# Altium PCB shield_lcd4-3.PcbDoc
Units mm, origin at the board's own origin, x right, y up, seen from the top; angles counter-clockwise.
Board outline 120 x 84 mm, 2 copper layers (Top Layer, Bottom Layer), stack 1.57 mm thick; 35 components, 142 nets, 267 pads, 113 vias.
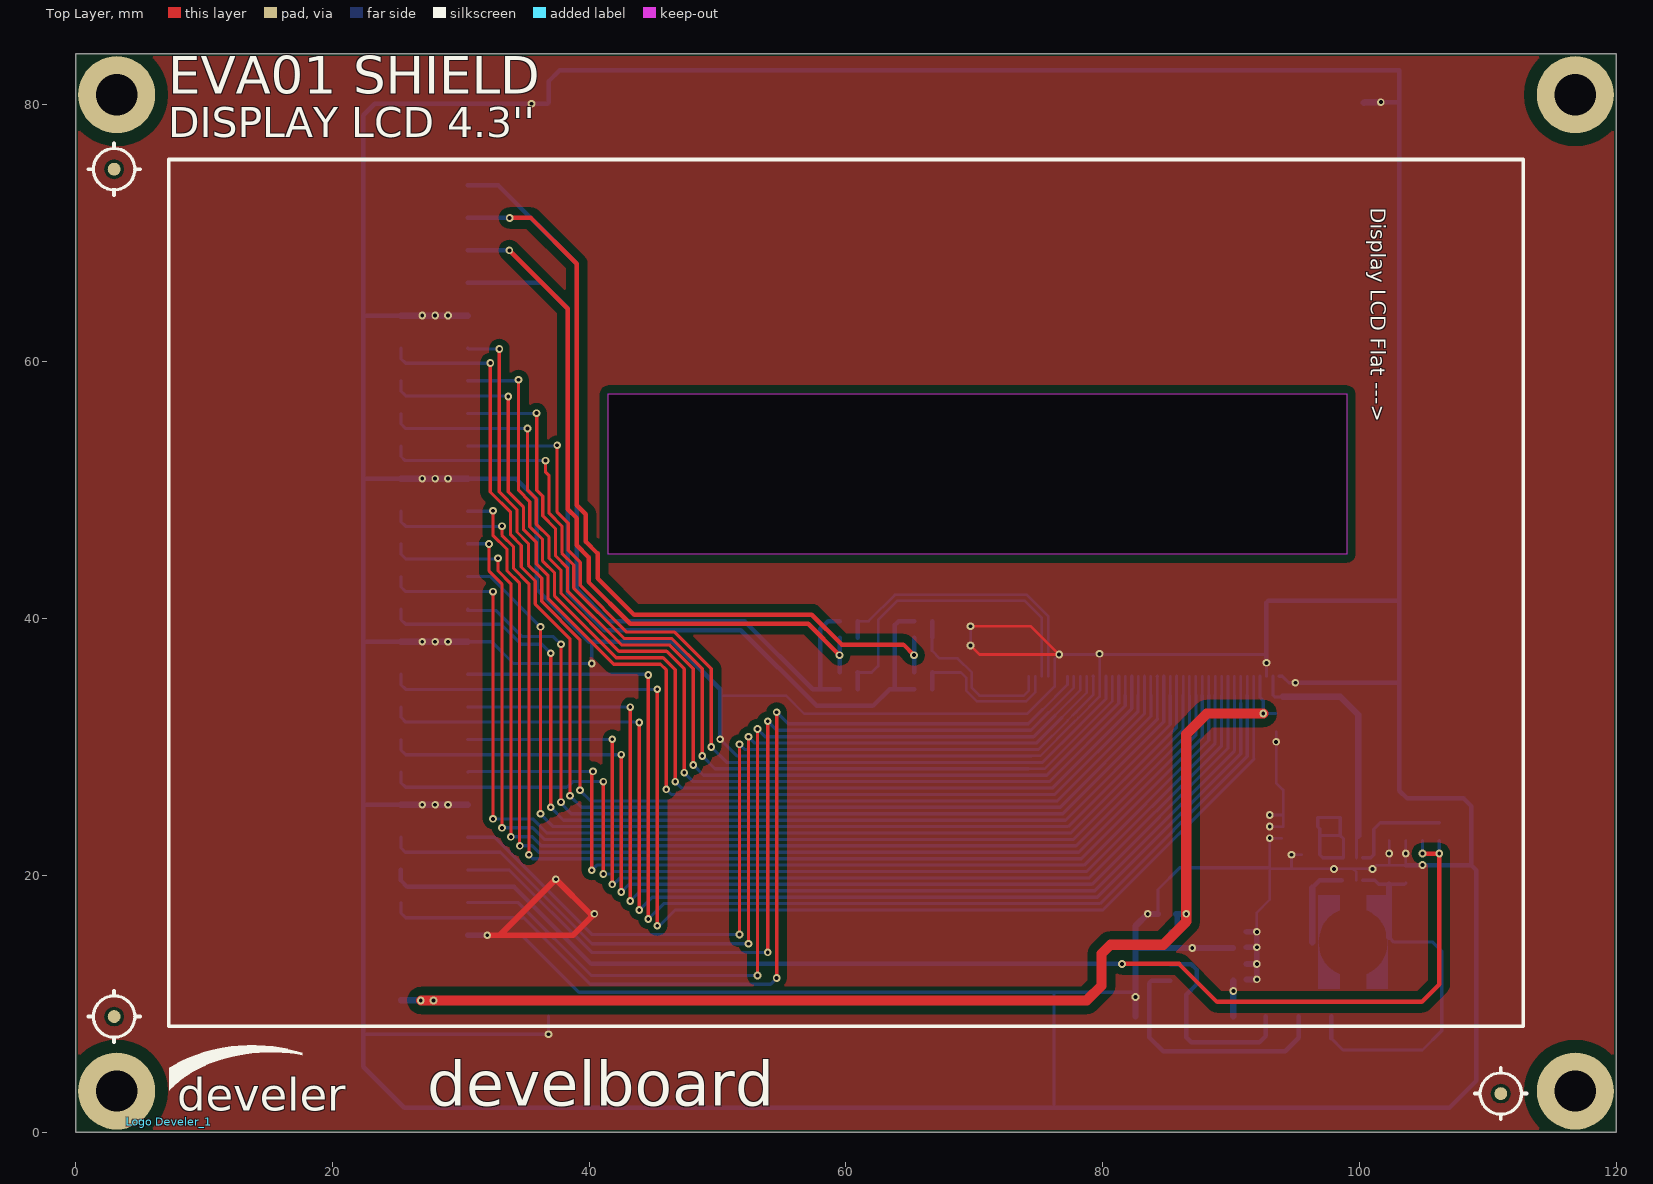
[diagram p0: Top Layer view]
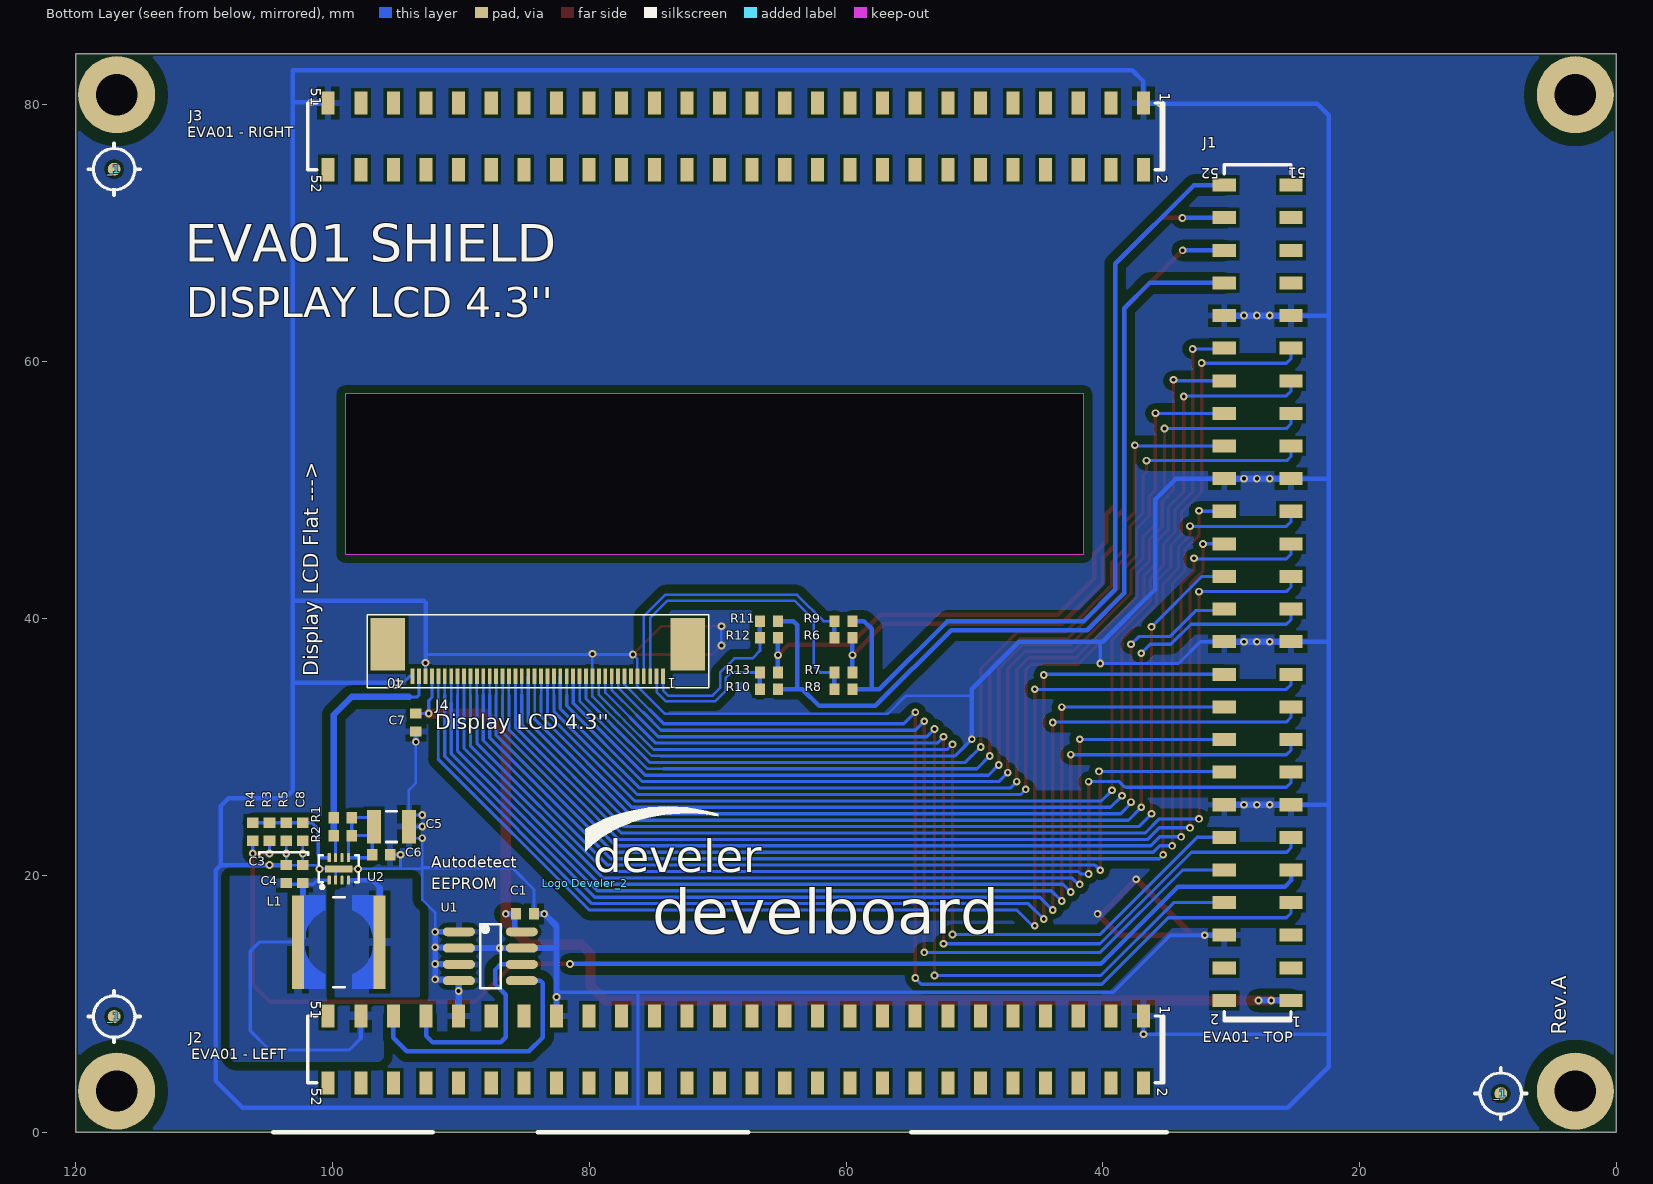
[diagram p1: Bottom Layer view, seen from below]

## Layer stack, top to bottom
Top Solder: solder mask 0.0102, Solder Resist, Dk 3.5
Top Layer: signal copper 0.035
Dielectric1: core 1.5, FR-4, Dk 4.2
Bottom Layer: signal copper 0.035
Bottom Solder: solder mask 0.0102, Solder Resist, Dk 3.5

## Board outline
0,0 0,84 120,84 120,0
cut-out: 99,57.5 99,45 41.5,45 41.5,57.5

## Design rules (kind name [scope] priority, off if disabled: settings)
Clearance Clearance_shld [(ObjectKind = 'Pad') And (Net = 'SHLD')] p1: gap=0.8 except(0.5: Track-SMDPad SMDPad-SMDPad)
Clearance Clearance_hole [(ObjectKind = 'Pad') And (Net = 'No Net') And (AsMM(HoleDiameter) = 3.2)] p2: gap=1
Clearance Clearance_poly [inpoly] p3: gap=0.25 except(0.65: Arc-Fill Arc-Poly Arc-Region Track-Fill Track-Poly Track-Region Poly-Poly Poly-Region Region-Region)
Clearance Clearance_80 [(ObjectKind = 'Track') And (AsMM(Width) = 0.8)] p4: gap=0.8
Clearance Clearance_45 [(ObjectKind = 'Track') And (AsMM(Width) = 0.45)] p5: gap=0.45
Clearance Clearance_35 [(ObjectKind = 'Track') And (AsMM(Width) = 0.35)] p6: gap=0.35
Clearance Clearance_com [incomponent('j4', 'u2')] p7: gap=0.15
Clearance [All] p8: gap=0.25
ComponentClearance [All] p1: gap=0.25 collisioncheckmode=3 verticalgap=0.25 showdistances=FALSE
HoleSize [All] p1: absolutevalues=TRUE maxlimit=10 minlimit=0.2 maxpercent=80.000 minpercent=20.000
HoleToHoleClearance [All] p1: gap=0.25 allowstackedmicrovias=TRUE
MinimumSolderMaskSliver MinimumSolderMaskSliver_con [incomponent('j4')] p1: minsoldermaskwidth=0.08
MinimumSolderMaskSliver [All] p2: minsoldermaskwidth=0.1
PlaneClearance [All] p1: clearance=0.5
PlaneConnect PlaneConnect_via [isvia or hasfootprint('TEST_POINT_SMD_R5x3MM')] p1: planeconnectstyle=Direct reliefexpansion=0.508 reliefentries=4 reliefconductorwidth=0.254 reliefairgap=0.254
PlaneConnect [All] p2: planeconnectstyle=Relief reliefexpansion=0.6 reliefentries=4 reliefconductorwidth=0.35 reliefairgap=0.35
PolygonConnect PolygonConnect_via [isvia or hasfootprint('TEST_POINT_SMD_R5x3MM')] p1: connectstyle=Direct reliefconductorwidth=0.254 reliefentries=4 polygonreliefangle="90 Angle" airgapwidth=0.254
PolygonConnect PolygonConnect_gnd [InNet('gnd')] p2: connectstyle=Relief reliefconductorwidth=0.5 reliefentries=4 polygonreliefangle="90 Angle" airgapwidth=0.35
PolygonConnect PolygonConnect_5v [InNet('+5V','sw')] p3: connectstyle=Relief reliefconductorwidth=0.65 reliefentries=4 polygonreliefangle="90 Angle" airgapwidth=0.35
PolygonConnect [All] p4: connectstyle=Relief reliefconductorwidth=0.35 reliefentries=4 polygonreliefangle="90 Angle" airgapwidth=0.6
RoutingVias [All] p1: holewidth=0.3 width=0.6 viastyle="Through Hole" minholewidth=0.2 minwidth=0.35 maxholewidth=0.5 maxwidth=1
SilkToSilkClearance [All] p1: silktosilkclearance=0.1
SilkToSolderMaskClearance [IsPad] p1: minsilkscreentomaskgap=0.15 clearancetoexposedcopper=TRUE
SolderMaskExpansion SolderMaskExpansion_via [isVia] p1: expansion=-10
SolderMaskExpansion [All] p2: expansion=0.05
Width [All] p1: maxlimit=5 minlimit=0.15 preferedwidth=0.25
22 further rules are at their usual default settings.

## Classes and differential pairs
net class Power: +3.3V GND VBATT

## Components (designator, comment, footprint, x,y, rotation, side; value= is the part's Value field where it differs from the comment)
_1 "" Fiducial_mark 117,75 r180 bottom
_1 "" Fiducial_mark 117,9 r180 bottom
_1 "" Fiducial_mark 9,3 r180 bottom
C1 "100nF" 0603_[1608] 85,17 r0 bottom
C3 "100nF" 0603_[1608] 102.3,20.1 r270 bottom
C4 "1uF" 0603_[1608] 103.6,20.1 r270 bottom
C5 "2.2uF" 1210_[3225] 95.4,23.8 r0 bottom
C6 "100nF" 0603_[1608] 96.2,21.6 r0 bottom
C7 "100nF" 0603_[1608] 93.5,31.9 r270 bottom
C8 "100nF" 0603_[1608] 102.3,23.4 r90 bottom
J1 "EVA01 - TOP" SOCKET_2x26_2.54MM_SMD 27.94,42.01 r90 bottom locked
J2 "EVA01 - LEFT" SOCKET_2x26_2.54MM_SMD 68.58,6.44 r0 bottom locked
J3 "EVA01 - RIGHT" SOCKET_2x26_2.54MM_SMD 68.58,77.56 r0 bottom locked
J4 "Display LCD 4.3''" fcc-zif_40pin_0.5mm 84,36.5 r0 bottom locked
L1 "22uH - WE 744062220" WE-TPC-6823-X 99.5,14.8 r0 bottom
"Logo Develer_1" "" Develer_logo_15x6mm 7.3,0.8 r0 top
"Logo Develer_2" "" Develer_logo_15x6mm 80.3,19.4 r180 bottom
R1 "NP" 0603_[1608] 99.2,24.5 r180 bottom
R2 "10R 1%" 0603_[1608] 99.2,23.1 r180 bottom
R3 "390K 1%" 0603_[1608] 104.9,23.4 r270 bottom
R4 "820K 1%" 0603_[1608] 106.2,23.4 r90 bottom
R5 "220K 1%" 0603_[1608] 103.6,23.4 r270 bottom
R6 "0R" 0603_[1608] 60.2,38.5 r180 bottom
R7 "NP" 0603_[1608] 60.2,35.8 r180 bottom
R8 "0R" 0603_[1608] 60.2,34.5 r180 bottom
R9 "NP" 0603_[1608] 60.2,39.8 r180 bottom
R10 "0R" 0603_[1608] 66,34.5 r180 bottom
R11 "NP" 0603_[1608] 66,39.8 r180 bottom
R12 "0R" 0603_[1608] 66,38.5 r180 bottom
R13 "NP" 0603_[1608] 66,35.8 r180 bottom
U1 "24C128" SOIC8 87.7,13.7 r180 bottom
U2 "LT3591EDDB" PQFN50P300X200X75_HS-9L 99.5,20.5 r180 bottom
? "" Fiducial_mark 111,3 r0 top
? "" Fiducial_mark 3,9 r0 top
? "" Fiducial_mark 3,75 r0 top

## Footprints (in the part's own frame and the unit in brackets; to place one, negate y for a bottom-side part, rotate by r counter-clockwise, add the part's x,y. Pads: shape width x height; smd on the part's side, far side on the other; paste and mask are expansions set on the pad)
0603_[1608] [mm] "Chip Capacitor, Body 1.6x0.8mm, IPC High Density"
  rect 0.8x0.9 smd: 1(-0.7,0) 2(0.7,0)
  body extent -0.75,-0.4 0.75,0.4, height 0.67
1210_[3225] [mm] "Chip Resistor, Body 3.2x2.5mm, IPC High Density"
  rect 1.1x2.6 smd: 1(-1.35,0) 2(1.35,0)
  silkscreen extent -0.4,-1.2 0.4,1.2, body extent -1.6,-1.25 1.6,1.25, height 1.7
Develer_logo_15x6mm [mm]
  silkscreen extent 0,2.47 10.36,5.98
fcc-zif_40pin_0.5mm [mm] "40 pins"
  rect 0.3x1.2 smd: 1(-9.75,0.99) 2(-9.25,0.99) 3(-8.75,0.99) 4(-8.25,0.99) 5(-7.75,0.99) 6(-7.25,0.99) 7(-6.75,0.99) 8(-6.25,0.99) 9(-5.75,0.99) 10(-5.25,0.99) 11(-4.75,0.99) 12(-4.25,0.99) 13(-3.75,0.99) 14(-3.25,0.99) 15(-2.75,0.99) 16(-2.25,0.99) 17(-1.75,0.99) 18(-1.25,0.99) 19(-0.75,0.99) 20(-0.25,0.99) 21(0.25,0.99) 22(0.75,0.99) 23(1.25,0.99) 24(1.75,0.99) 25(2.25,0.99) 26(2.75,0.99) 27(3.25,0.99) 28(3.75,0.99) 29(4.25,0.99) 30(4.75,0.99) 31(5.25,0.99) 32(5.75,0.99) 33(6.25,0.99) 34(6.75,0.99) 35(7.25,0.99) 36(7.75,0.99) 37(8.25,0.99) 38(8.75,0.99) 39(9.25,0.99) 40(9.75,0.99)
  rect 2.7x4.1 smd: Z1(-11.68,-1.5) Z2(11.68,-1.5)
  silkscreen extent -13.3,-3.8 13.3,1.89, body extent -13.2,-3.8 13.2,1.3, height 2.06
Fiducial_mark [mm]
  round 1 smd mask+0.95: "Fiducial Mark"(0,0)
  silkscreen extent -2,-2 2,2
PQFN50P300X200X75_HS-9L [mm] "PQFN, 8-Leads, Body 3,00x2,00mm, Pitch 0,50mm, Thermal Pad 2,15x0,56mm, IPC High Density"
  rrect50% 0.25x0.7 smd: 1(-0.75,-0.875) 2(-0.25,-0.875) 3(0.25,-0.875) 4(0.75,-0.875) 5(0.75,0.875) 6(0.25,0.875) 7(-0.25,0.875) 8(-0.75,0.875)
  rect 2.15x0.56 smd: 9(0,0)
  silkscreen extent -1.55,-1.52 1.55,1.05, body extent -1.55,-1.05 1.55,1.05, height 0.75
SOCKET_2x26_2.54MM_SMD [mil] "52pin"
  rect 40x71 smd: 1(-1250,-102.36) 3(-1150,-102.36) 4(-1150,102.36) 5(-1050,-102.36) 6(-1050,102.36) 7(-950,-102.36) 8(-950,102.36) 9(-850,-102.36) 10(-850,102.36) 11(-750,-102.36) 12(-750,102.36) 13(-650,-102.36) 14(-650,102.36) 15(-550,-102.36) 16(-550,102.36) 17(-450,-102.36) 18(-450,102.36) 19(-350,-102.36) 20(-350,102.36) 21(-250,-102.36) 22(-250,102.36) 23(-150,-102.36) 24(-150,102.36) 25(-50,-102.36) 26(-50,102.36) 27(50,-102.36) 28(50,102.36) 29(150,-102.36) 30(150,102.36) 31(250,-102.36) 32(250,102.36) 33(350,-102.36) 34(350,102.36) 35(450,-102.36) 36(450,102.36) 37(550,-102.36) 38(550,102.36) 39(650,-102.36) 40(650,102.36) 41(750,-102.36) 42(750,102.36) 43(850,-102.36) 44(850,102.36) 45(950,-102.36) 46(950,102.36) 47(1050,-102.36) 48(1050,102.36) 49(1150,-102.36) 50(1150,102.36) 51(1250,-102.36) 52(1250,102.36)
  rect 39.37x70.87 smd: 2(-1250,102.36)
  silkscreen extent -1313,-102 1313,102, body extent -1311,-132 1311,132, height 292
SOIC8 [mm] "SOIC, 8-Leads, Body 4.9x3.8mm, Pitch 1.27mm, IPC Low Density"
  oval 2.5x0.7 smd: 1(-2.45,1.905) 2(-2.45,0.635) 3(-2.45,-0.635) 4(-2.45,-1.905) 5(2.45,-1.905) 6(2.45,-0.635) 7(2.45,0.635) 8(2.45,1.905)
  silkscreen extent -0.8,-2.5 0.8,2.5, body extent -2,-2.5 2,2.5, height 1.75
WE-TPC-6823-X [mm] "SMD Inductor, 2-Leads, Body 6,8x6,8mm"
  rect 0.95x7.3 smd: 1(-3.175,0) 2(3.175,0)
  Top Layer region: -2.7,-3.65 -1.05,-3.65 -1.05,-2.5 -1.45,-2.3 -1.65,-2.15 -1.9,-1.95 -2.2,-1.6 -2.35,-1.35 -2.45,-1.15 -2.65,-0.55 -2.7,0
  Top Layer region: 2.7,-3.65 1.05,-3.65 1.05,-2.5 1.35,-2.35 1.7,-2.1 1.95,-1.9 2,-1.85 2.2,-1.6 2.35,-1.35 2.45,-1.15 2.55,-0.9 2.6,-0.7 2.65,-0.5 2.7,0
  Top Layer region: 2.7,3.65 1.05,3.65 1.05,2.5 1.35,2.35 1.65,2.15 2,1.85 2.3,1.45 2.55,0.95 2.65,0.55 2.7,0
  Top Layer region: -2.7,3.65 -1.05,3.65 -1.05,2.5 -1.45,2.3 -1.6,2.2 -1.9,1.95 -2.2,1.6 -2.4,1.25 -2.55,0.95 -2.6,0.75 -2.65,0.5 -2.7,0
  silkscreen extent -0.45,-3.5 0.45,3.5, body extent -3.4,-3.4 3.4,3.4, height 2.29

## Part data
C1 C3 C6 C8: library part Cap, "Ceramic X7R 50V"
C4: library part Cap, "Ceramic X7R, X5R 16V"
C5: library part Cap, "Ceramic X7R, X5R 50V"
C7: library part Cap, "Ceramic X5R 6.3V, 10V"
J1: library part "Header 26x2", "Socket Header, 26 pin, 13x2, 2.54mm, H=8.5mm"
J2 J3: library part "Header 26x2", "Pin header 26x2"
J4: library part "Header 40", "40-pin, 0.5mm, SMT, ZIF, Horizontal, Top Contact (WE 68714014022; Molex: 54104-4031)"
L1: library part Inductor, "Power Inductor"
R1 R2: library part Res1, "Resistor 0.125W"
R3 R4 R5 R6 R7 R8 R9 R10 R11 R12 R13: library part Res1, "Resistor"
U1: library part EEPROM-SOIC8, "EEPROM"
U2: library part LT3591, "White LED Driver with Integrated Schottky"

## Free pads (board coordinates)
  round 6 hole 3.2: Hole(3.2,3.2) Hole(3.2,80.8) Hole(116.8,3.2) Hole(116.8,80.8)

## Via types
v1: diameter 0.6, hole 0.3, Top Layer to Bottom Layer, 113 vias

## Nets (pads, with @x,y where several pads share a name; then routed paths per layer and width w, separated by ;. In a path a pad name is that pad's centre, name@x,y a point inside that pad or via, vN(x,y) a via of type N, cw(c..) or ccw(c..) an arc to the next point about the centre after c; other vN are vias at no path point)
+1.8V: J3.49
+3.3V: C1.2 C7.1 J1.1 J4.37 U1.8 | length 94.1
  Top Layer w0.8: v1@26.9,10.26 78.76,10.26 79.9,11.4 79.9,13.9 80.6,14.6 84.7,14.6 86.5,16.4 v1(86.5,17) 86.5,31 88.1,32.6 v1(92.5,32.6)
  Bottom Layer w0.25: J1.1 J1.1@25.4,10.2 ; J4.37 92.25,33.85 92.5,33.6 v1(92.5,32.6) C7.1
  Bottom Layer w0.45: U1.8@85.35,15.605 85.705,15.605 85.8,15.7 C1.2@85.8,17 ; C1.2 C1.2@85.8,17 ; v1(86.5,17) C1.2@85.8,17
  Bottom Layer w0.5: J1.1 v1@27.9,10.26
  other v1: 26.88,10.26 27.88,10.26
+5V: C3.2 C4.2 J2.49 L1.2 U2.1 | length 29.8
  Bottom Layer w0.25: 97.79,7.31 98.7,6.4 104.9,6.4 106.4,7.9 106.4,14.1 105.7,14.8 L1.2 L1.2@102.3,15.175 ; U2.1 101.175,19.625 101.5,19.3 C3.2@102.3,19.3 ; C3.2 C3.2@102.3,19.3 ; C4.2 103.5,19.3 C3.2@102.3,19.3
  Bottom Layer w0.345: 97.79,7.31 J2.49
  Bottom Layer w0.45: L1.2@102.3,15.175 C3.2@102.3,19.3
ADCREF_EXT: J2.46
BOOT_RECOVERY: J2.52
GND: C1.1 C3.1 C4.1 C5.1 C6.1 C7.2 C8.1 J1.6 J1.13 J1.14 J1.23 J1.24 J1.33 J1.34 J1.43 J1.44 J2.1 J2.37 J2.43 J3.1 J3.51 J4.5 J4.12 J4.38 J4.40 R5.2 U1.1 U1.2 U1.3 U1.4 U1.7 U2.2 U2.9 | length 726.7
  Top Layer w0.2: v1(69.7,37.9) 70.4,37.2 v1(76.6,37.2) 74.4,39.4 v1(69.7,39.4)
  Top Layer w0.45: v1(32.06,15.34) 33.04,15.34 ; 33.04,15.34 v1(37.4,19.7) 40.1,17 v1(40.4,17) 38.74,15.34 33.04,15.34
  Bottom Layer w0.2: 50.2,34 55.323,34 56.748,32.575 74.115,32.575 76.25,34.71 J4.5 76.25,36.85 v1(76.6,37.2) v1@79.75,37.2 ; v1(69.7,37.9) v1(69.7,39.4) ; 74.53,29.3 75.129,29.3 77.722,31.893 ; 77.722,31.894 78.103,32.275 79.75,33.922 J4.12 v1@79.75,37.2 ; v1@79.8,37.3 v1(79.75,37.25) v1@79.75,37.2 ; v1(92,15.6) 92,17.1 93,18.1 93,20.6 ; J4.38 v1(92.75,36.55) ; 92.75,37.2 v1@79.75,37.2 ; v1(93,23.8) C5.1@93.95,23.8 ; v1(93,24.7) C5.1@93.95,24.7 ; C7.2 v1(93.5,30.4) 93.5,27.2 94.05,26.65 C5.1 ; C5.1@93.95,22.9 v1(93,22.9) 93,20.6 ; C6.1 v1(94.7,21.6) 94.7,20.6 94.8,20.5 ; U2.2 99.75,20.25 U2.9 ; C8.1 v1(102.3,21.7) C3.1 ; R5.2 v1(103.6,21.7) C4.1 C3.1 ; 93,20.6 93.1,20.5 94.8,20.5 ; 94.8,20.5 v1(98,20.5) U2.9 ; U2.9 v1(101,20.5) 101.3,20.8 C3.1
  Bottom Layer w0.25: 22.4,7.8 22.57,7.63 v1(36.83,7.63) J2.1 ; J1.24 32.4,38.2 34.1,36.5 40.1,36.5 40.2,36.6 40.2,38.2 ; v1(32.06,15.34) 34.76,15.34 39.2,10.9 76.2,10.9 ; v1(50.2,30.6) 51.5,29.3 74.423,29.3 ; 76.2,1.9 76.2,10.9 ; 82.5,10.9 76.2,10.9 ; C1.1 84.3,18.9 86,20.6 93,20.6 ; J4.40 93.99,35.51 94.5,35 v1(95,35)
  Bottom Layer w0.35: 22.4,25.5 J1.13 ; J1.23 22.5,38.2 22.4,38.1 ; J1.33 22.4,50.9 ; J1.43 22.4,63.6 ; J1.34 34.3,50.9 35.9,49.3 35.9,42.3 40,38.2 40.2,38.2 46.5,38.2 50.2,34.5 50.2,34 v1(50.2,30.6) ; v1(92.75,36.55) 92.75,37.2 92.75,41.25 92.9,41.4 103.1,41.4 ; v1(95,35) 103.1,35 ; v1(101.66,80.22) 103.08,80.22 103.1,80.2 ; C4.1 v1(104.9,20.8) 108.7,20.8 ; 22.4,38.1 22.4,50.9 ; 22.4,38.1 22.4,25.5 22.4,7.8 22.4,5.1 25.6,1.9 76.2,1.9 107,1.9 109.1,4 109.1,20.4 108.7,20.8 ; 22.4,50.9 22.4,63.6 ; 22.4,63.6 22.4,79.2 23.3,80.1 v1(35.5,80.1) 36.77,80.1 J3.1 36.83,81.83 37.7,82.7 103.1,82.7 103.1,80.2 ; 103.1,35 103.1,26.6 103.7,26 108.1,26 108.7,25.4 108.7,20.8 ; 103.1,35 103.1,41.4 ; 103.1,41.4 103.1,80.2
  Bottom Layer w0.45: J1.6 v1(32.06,15.34) ; 82.55,14.3 82.585,14.335 U1.7 v1(86.964,14.335) U1.2 ; v1(83.5,17) C1.1 ; U1.4@91.2,11.9 v1(92,11.9) v1(92,13.1) ; U1.3@91.2,13.1 v1(92,13.1) ; U1.2@91.2,14.4 v1(92,14.4) ; U1.1@91.2,15.6 v1(92,15.6) v1(92,14.4) ; v1(92,13.1) v1(92,14.4)
  Bottom Layer w0.5: J1.13 v1@29,25.5 ; J1.23 J1.24 ; J1.33 J1.34 ; J1.43 J1.44 ; J1.13@25.34,25.5 v1(27,25.5) v1(28,25.5) v1(29,25.5) ; J1.23@25.34,38.2 v1(27,38.2) v1(28,38.2) v1(29,38.2) ; J1.33@25.34,50.9 v1(27,50.9) v1(28,50.9) v1(29,50.9) ; J1.43@25.34,63.6 v1(27,63.6) v1(28,63.6) v1(29,63.6) ; J1.14 v1@29,25.5 ; J2.37 v1(82.55,10.52) 82.55,14.3 82.55,16.05 v1(83.5,17) ; U1.4 90.17,11.775 v1(90.17,11) J2.43 ; J3.51 100.39,80.22 v1(101.66,80.22)
  other v1: 40.2,36.5
HHSDMA_DHSDM_V14: J2.41
HHSDPA_DHSDP_W14: J2.39
JTAGSEL_V2: J2.35
LED+: J4.39 R1.1 R2.1 U2.7 | length 19.9
  Bottom Layer w0.25: J4.39 93.25,34.05 93.4,33.9 94,33.9 ; U2.7 99.75,22.95 R2.1
  Bottom Layer w0.5: 94,33.9 98.5,33.9 99.9,32.5 R1.1 R2.1
NetC5_2: C5.2 C6.2 R1.2 R2.2 U2.5 | length 11.5
  Bottom Layer w0.25: C5.2@96.9,23.1 C6.2 97.125,21.375 U2.5 98.75,22.85 R2.2 ; C5.2@96.9,23.1 R2.2 ; C5.2@96.9,23.1 96.9,23.65 C5.2 96.75,24.5 R1.2 R2.2
NetC8_2: C8.2 R3.1 R4.2 R5.1 U2.8 | length 8.3
  Bottom Layer w0.25: U2.8 100.875,21.375 101.1,21.6 101.1,23.6 101.6,24.1 C8.2 R4.2
NetJ4_1: J4.1 R11.1 R12.1 | length 13.3
  Bottom Layer w0.2: R12.1 66.7,37.5 67.3,36.9 68.7,36.9 69.8,35.8 69.8,34.6 70.4,34 73.85,34 74.25,34.4 J4.1
  Bottom Layer w0.35: R12.1 R11.1
NetJ4_2: J4.2 R10.1 R13.1 | length 12.4
  Bottom Layer w0.2: R13.1 68.95,35.8 69.35,35.4 69.35,34.414 70.214,33.55 74.036,33.55 74.75,34.264 J4.2
  Bottom Layer w0.35: R10.1 R13.1
NetJ4_3: J4.3 R7.1 R8.1 | length 25.3
  Bottom Layer w0.2: R7.1@60.8,35.8 R7.1 62,35.8 62.5,36.3 62.5,39.9 64,41.4 73.9,41.4 75.25,40.05 J4.3
  Bottom Layer w0.35: R8.1 R7.1
NetJ4_4: J4.4 R6.1 R9.1 | length 22.4
  Bottom Layer w0.2: R9.1 61.764,39.8 63.814,41.85 74.086,41.85 75.75,40.186 J4.4
  Bottom Layer w0.35: R6.1 R9.1
PA0_LCDDAT0_TMS_A7: J1.41 J4.20 | length 95.9
  Top Layer w0.25: v1(32.3,59.9) 32.3,49.855 33.875,48.28 33.875,46.532 34.714,45.693 34.714,44.014 35.8,42.928 35.8,41.131 38.5,38.431 v1(38.5,26.2)
  Bottom Layer w0.2: 83.75,34.05 J4.20
  Bottom Layer w0.25: J1.41 25.34,60.24 25.7,59.88 v1@32.3,59.88 ; v1(38.5,26.2) 39.4,25.3 76.68,25.3 83.75,32.37 83.75,34.05
PA1_LCDDAT1_F6: J1.42 J4.19 | length 89.5
  Top Layer w0.25: v1(33,61) 33,49.862 34.375,48.487 34.375,46.739 35.268,45.846 35.268,44.168 36.3,43.136 36.3,41.338 39.275,38.363 v1(39.275,26.627)
  Bottom Layer w0.25: J1.42 30.6,61 v1(33,61) ; v1(39.275,26.627) 40.102,25.8 76.473,25.8 83.25,32.577 J4.19
PA2_LCDDAT2_G1_TXCK_E6: J1.39 J4.18 | length 89.5
  Top Layer w0.25: v1(33.7,57.3) 33.7,49.869 34.875,48.694 34.875,46.946 35.871,45.95 35.871,44.271 36.8,43.343 36.8,41.545 41.895,36.45 45.55,36.45 46,36 v1(46,26.7)
  Bottom Layer w0.2: 82.75,34.05 J4.18
  Bottom Layer w0.25: J1.39 25.34,57.7 25.7,57.34 v1@33.7,57.34 ; v1(46,26.7) 46.4,26.3 76.266,26.3 82.75,32.784 82.75,34.05
PA3_LCDDAT3_G1_RXCK_C6: J1.40 J4.17 | length 83.3
  Top Layer w0.25: v1(34.5,58.6) 34.5,49.986 35.375,49.111 35.375,47.153 36.371,46.157 36.371,44.478 37.3,43.55 37.3,41.752 42.102,36.95 45.757,36.95 46.7,36.007 v1(46.7,27.3)
  Bottom Layer w0.25: J1.40 v1@34.5,58.52 ; v1(46.7,27.3) 47.2,26.8 76.059,26.8 82.25,32.991 J4.17
PA4_LCDDAT4_G1_TXEN_D6: J1.37 J4.16 | length 84.3
  Top Layer w0.25: v1(35.2,54.8) 35.2,49.993 35.875,49.318 35.875,47.361 36.871,46.364 36.871,44.686 37.8,43.757 37.8,41.96 42.309,37.45 46.029,37.45 47.4,36.079 v1(47.4,28)
  Bottom Layer w0.2: 81.75,34.05 J4.16
  Bottom Layer w0.25: J1.37 25.34,55.16 25.7,54.8 v1(35.2,54.8) ; v1(47.4,28) 48.1,27.3 75.852,27.3 81.75,33.198 81.75,34.05
PA5_LCDDAT5_G1_TXER_B6: J1.38 J4.15 | length 77.9
  Top Layer w0.25: v1(35.9,56) 35.914,55.986 35.914,49.986 36.375,49.525 36.375,48 37.371,47.004 37.371,44.893 38.3,43.964 38.3,42.167 42.517,37.95 46.236,37.95 48.1,36.086 v1(48.1,28.6)
  Bottom Layer w0.25: J1.38 v1@35.9,55.98 ; v1(48.1,28.6) 48.9,27.8 75.645,27.8 81.25,33.405 J4.15
PA6_LCDDAT6_G1_CRS_A6: J1.35 J4.14 | length 78.9
  Top Layer w0.25: v1(36.6,52.3) 36.6,51.4 36.875,51.125 36.875,48.207 37.871,47.211 37.871,45.1 38.8,44.171 38.8,42.374 42.724,38.45 46.443,38.45 48.8,36.093 v1(48.8,29.3)
  Bottom Layer w0.2: 74.2,28.3 75.473,28.3 80.75,33.577 J4.14
  Bottom Layer w0.25: J1.35 25.34,52.62 25.66,52.3 v1(36.6,52.3) ; v1(48.8,29.3) 49.8,28.3 74.2,28.3
PA7_LCDDAT7_E5: J1.36 J4.13 | length 72.6
  Top Layer w0.25: v1(37.5,53.5) 37.5,48.289 38.371,47.418 38.371,45.307 39.3,44.378 39.3,42.581 42.931,38.95 46.65,38.95 49.5,36.1 v1(49.5,30)
  Bottom Layer w0.25: J1.36 v1@37.48,53.44 ; v1(49.5,30) 50.7,28.8 75.301,28.8 78.197,31.696 ; 78.197,31.697 78.3,31.8 80.25,33.75 J4.13
PA8_LCDDAT8_TCK_A5: J1.31 J4.28 | length 96.6
  Top Layer w0.25: v1(33.2,47.2) 33.2,46.5 34.1,45.6 34.1,43.921 35.3,42.721 v1(35.3,21.6)
  Bottom Layer w0.2: 87.75,34.05 J4.28
  Bottom Layer w0.25: J1.31 25.34,47.54 25.7,47.18 v1@33.2,47.18 ; v1(35.3,21.6) 35.6,21.3 78.337,21.3 87.75,30.713 87.75,34.05
PA9_LCDDAT9_G1_COL_F4: J1.32 J4.27 | length 90.2
  Top Layer w0.25: v1(32.5,48.4) 32.5,46.493 33.6,45.393 33.6,43.714 34.575,42.739 34.575,22.325 v1(34.6,22.3)
  Bottom Layer w0.2: 87.25,34.05 J4.27
  Bottom Layer w0.25: J1.32 v1@32.5,48.36 ; v1(34.6,22.3) 35.554,22.3 36.054,21.8 78.13,21.8 87.25,30.92 87.25,34.05
PA10_LCDDAT10_G1_RXDV_F5: J1.29 J4.26 | length 91.8
  Top Layer w0.25: v1(32.9,44.7) 32.9,43.707 33.9,42.707 v1(33.9,23)
  Bottom Layer w0.2: 86.75,34.05 J4.26
  Bottom Layer w0.25: J1.29 25.34,45 25.7,44.64 v1@32.9,44.64 ; v1(33.9,23) 35.562,23 36.262,22.3 77.923,22.3 86.75,31.127 86.75,34.05
PA11_LCDDAT11_G1_RXER_D5: J1.30 J4.25 | length 85.3
  Top Layer w0.25: v1(32.2,45.8) 32.2,43.7 33.2,42.7 v1(33.2,23.7)
  Bottom Layer w0.2: 86.25,34.05 J4.25
  Bottom Layer w0.25: J1.30 v1@32.2,45.82 ; v1(33.2,23.7) 35.593,23.7 36.493,22.8 77.716,22.8 86.25,31.334 86.25,34.05
PA12_LCDDAT12_G1_RX0_G5: J1.27 J4.24 | length 86.9
  Top Layer w0.25: v1(32.5,24.4) v1(32.5,42.1)
  Bottom Layer w0.25: J1.27 25.34,42.46 25.7,42.1 v1(32.5,42.1) ; v1(32.5,24.4) 35.6,24.4 36.7,23.3 77.509,23.3 85.75,31.541 J4.24
PA13_LCDDAT13_G1_RX1_C5: J1.28 J4.23 | length 78.4
  Top Layer w0.25: v1(36.2,24.8) v1(36.2,39.355)
  Bottom Layer w0.2: 85.25,34.05 J4.23
  Bottom Layer w0.25: J1.28 32.274,43.28 v1(36.2,39.355) ; v1(36.2,24.8) 37.2,23.8 77.302,23.8 85.25,31.748 85.25,34.05
PA14_LCDDAT14_G1_TX0_E4: J1.25 J4.22 | length 80.5
  Top Layer w0.25: v1(37,25.3) v1(37,37.3)
  Bottom Layer w0.25: J1.25 25.34,39.92 25.7,39.56 33.133,39.56 34.693,38 36.3,38 v1(37,37.3) ; v1(37,25.3) 38,24.3 77.094,24.3 84.75,31.956 J4.22@84.75,35.51
PA15_LCDDAT15_G1_TX1_B5: J1.26 J4.21 | length 74.1
  Top Layer w0.25: v1(37.8,25.7) v1(37.8,38)
  Bottom Layer w0.2: 84.25,32.214 J4.21
  Bottom Layer w0.25: J1.26 30.54,40.625 32.775,40.625 34.8,38.6 37.2,38.6 v1(37.8,38) ; v1(37.8,25.7) 37.8,25.6 38.6,24.8 76.887,24.8 84.25,32.163 84.25,32.214 ; J4.21@84.225,35.485 J4.21
PA16_LCDDAT16_NTRST_H6: J1.21 J4.36 | length 97.7
  Top Layer w0.25: v1(45.3,16.075) v1(45.3,34.5)
  Bottom Layer w0.2: 91.75,29.057 91.75,33.4 J4.36
  Bottom Layer w0.25: J1.21 25.34,34.84 25.7,34.48 v1@45.28,34.48 ; v1(45.3,16.075) 45.475,16.075 46.7,17.3 79.994,17.3 91.75,29.056 ; v1(45.3,34.5) v1@45.28,34.48 ; v1(45.3,34.5) v1@45.28,34.48
PA17_LCDDAT17_D4: J1.22 J4.35 | length 91.2
  Top Layer w0.25: v1(44.6,16.6) v1(44.6,35.6)
  Bottom Layer w0.2: 91.25,34.05 J4.35
  Bottom Layer w0.25: J1.22 44.54,35.66 v1(44.6,35.6) ; v1(44.6,16.6) 45.8,17.8 79.787,17.8 91.25,29.263 91.25,34.05
PA18_LCDDAT18_G1_RX2_G4: J1.19 J4.34 | length 92.1
  Top Layer w0.25: v1(43.9,17.3) v1(43.9,31.9)
  Bottom Layer w0.2: 90.75,33.4 J4.34
  Bottom Layer w0.25: J1.19 25.34,32.3 25.7,31.94 43.86,31.94 v1(43.9,31.9) ; v1@43.8,17.4 44,17.4 44.9,18.3 79.58,18.3 90.75,29.47 90.75,33.4
PA19_LCDDAT19_G1_RX3_C4: J1.20 J4.33 | length 85.3
  Top Layer w0.25: v1(43.2,18) v1(43.2,33.1)
  Bottom Layer w0.2: 90.25,34.05 J4.33
  Bottom Layer w0.25: J1.20 42.98,33.12 v1@43,33.1 ; v1@43.18,33.12 v1(43.2,33.1) ; v1(43.2,18) 44,18.8 79.373,18.8 90.25,29.677 90.25,34.05
PA20_LCDDAT20_G1_TX2_A3: J1.17 J4.32 | length 86.3
  Top Layer w0.25: v1(42.5,18.7) v1(42.5,29.4)
  Bottom Layer w0.2: 89.75,33.4 J4.32
  Bottom Layer w0.25: J1.17 25.34,29.76 25.7,29.4 v1(42.5,29.4) ; v1(42.5,18.7) 43.1,19.3 79.165,19.3 89.75,29.885 89.75,33.4
PA21_LCDDAT21_G1_TX3_B4: J1.18 J4.31 | length 79.9
  Top Layer w0.25: v1(41.8,19.3) v1(41.8,30.6)
  Bottom Layer w0.2: 89.25,34.05 J4.31
  Bottom Layer w0.25: J1.18 41.78,30.58 v1(41.8,30.6) ; v1(41.8,19.3) 41.907,19.3 42.407,19.8 ; 42.4,19.8 78.958,19.8 89.25,30.092 89.25,34.05
PA22_LCDDAT22_G1_MDC_B3: J1.15 J4.30 | length 81.2
  Top Layer w0.25: v1(41.1,20.1) v1(41.1,27.3)
  Bottom Layer w0.2: 88.75,34.05 J4.30
  Bottom Layer w0.25: J1.15 25.34,27.22 25.7,26.86 38.205,26.86 38.22,26.875 38.275,26.875 38.702,27.302 41.098,27.302 v1(41.1,27.3) ; v1(41.1,20.1) 41.7,20.1 41.9,20.3 78.751,20.3 88.75,30.299 88.75,34.05
PA23_LCDDAT23_G1_MDIO_A4: J1.16 J4.29 | length 74.9
  Top Layer w0.25: v1(40.2,20.4) 40.2,28 v1(40.3,28.1)
  Bottom Layer w0.2: 88.25,34.05 J4.29
  Bottom Layer w0.25: J1.16 30.6,28.1 v1(40.3,28.1) v1@40.24,28.04 ; v1(40.2,20.4) 40.6,20.8 78.544,20.8 88.25,30.506 88.25,34.05
PA24_LCDPWM_PCK0_H5: J1.9 R3.2 R4.1 | length 99.7
  Top Layer w0.35: v1(81.5,13.1) 85.94,13.1 88.9,10.14 104.84,10.14 106.2,11.5 v1(106.2,21.7) v1(104.9,21.7)
  Bottom Layer w0.25: v1(104.9,21.7) R3.2 ; v1(106.2,21.7) R4.1
  Bottom Layer w0.35: J1.9 25.34,19.6 25.84,19.1 34.167,19.1 40.167,13.1 v1(81.5,13.1)
PA25_LCDDISP_TD0_F3: J1.11 J4.10 | length 76.6
  Top Layer w0.25: v1(52.4,14.675) v1(52.4,30.8)
  Bottom Layer w0.2: 76.797,32.276 78.75,34.229 J4.10
  Bottom Layer w0.25: J1.11 25.34,22.14 25.68,21.8 33.093,21.8 40.218,14.675 v1(52.4,14.675) ; v1(52.4,30.8) 52.9,30.3 74.821,30.3 76.797,32.276
PA26_LCDVSYNC_PWMH0_SP1_NPCS1_E3: J1.10 J4.8 | length 70.4
  Top Layer w0.25: v1(53.9,14) v1(53.9,32)
  Bottom Layer w0.2: 75.797,32.69 75.826,32.69 77.75,34.614 J4.8
  Bottom Layer w0.25: J1.10 33.766,20.42 40.186,14 v1(53.9,14) ; v1(53.9,32) 54.6,31.3 74.407,31.3 75.797,32.69
PA27_LCDHSYNC_PWML0_SPI1_NPCS2_H4: J1.8 J4.9 | length 72.1
  Top Layer w0.25: v1(53.1,12.2) v1(53.1,31.4)
  Bottom Layer w0.2: 76.297,32.483 78.25,34.436 J4.9
  Bottom Layer w0.25: J1.8 34.467,17.88 40.147,12.2 v1(53.1,12.2) ; v1(53.1,31.4) 53.7,30.8 74.614,30.8 76.297,32.483
PA28_LCDPCK_PWMH1_SP1_NPCS3_G3: J1.12 J4.11 | length 70.2
  Top Layer w0.25: v1@51.7,15.2 v1(51.7,30.2)
  Bottom Layer w0.2: 72.8,29.8 74.993,29.8 77.272,32.079 ; 77.272,32.08 77.917,32.725 79.25,34.058 J4.11
  Bottom Layer w0.25: J1.12 32.64,22.96 40.2,15.4 v1(51.7,15.4) ; v1(51.7,30.2) 52.1,29.8 72.8,29.8
PA29_LCDDEN_PWML1_J5: J1.7 J4.7 | length 78.2
  Top Layer w0.25: v1(54.6,12) v1(54.6,32.7)
  Bottom Layer w0.2: 75.297,32.897 77.25,34.85 J4.7
  Bottom Layer w0.25: J1.7 25.34,17.06 25.7,16.7 34.9,16.7 40.075,11.525 54.125,11.525 v1(54.6,12) ; v1(54.6,32.7) 55.5,31.8 74.2,31.8 75.297,32.897
PA30_TWD0_D3: J2.47 U1.5 | length 20.2
  Bottom Layer w0.35: U1.5 83.795,11.795 83.6,11.6 83.6,7.4 84.7,6.3 94.2,6.3 95.25,7.35 J2.47
PA31_TWCK0_J4: J2.45 U1.6 | length 15.9
  Bottom Layer w0.35: U1.6 86.9,13.065 87.3,12.665 87.3,11.5 86.5,10.7 86.5,7.4 86.9,7 92.2,7 92.71,7.51 J2.45
PB1_G0_RXCK_SCK2_ISI_PCK_A2: J2.3
PB3_G0_TXER_CTS2_ISI_VSYNC_C2: J2.6
PB4_G0_CRS_RXD2_ISI_HSYNC_J3: J2.14
PB5_G0_COL_TXD2_PCK2_H2: J2.12
PB10_G0_RX2_PCK2_PWML1_F1: J2.10
PB11_G0_RX3_RTS2_PWMH1_K4: J2.13
PB14_G0_TX2_SPI2_NPCS1_PWMH0_A1: J2.5
PB15_G0_TX3_SPI2_NPCS2_PWML0_E2: J2.7
PB18_SPI1_MISO_K2: J1.45
PB19_SPI1_MOSI_C1: J1.47
PB20_SPI1_SPCK__D1: J1.49
PB21_SPI1_NPCS0_L3: J2.15
PB22_SPI1_NPCS1_G1: J2.9
PB23_SPI1_NPCS2_H1: J1.51
PB24_DRXD_TDI_E1: J2.8
PB25_DTXD_TDO_J1: J2.11
PB26_PCK0_RK0_PWMH0_M5: J3.45
PB27_SPI1_NPCS3_TK0_PWML0_L2: J2.17
PB28_SPI2_NPCS3_TD0_PWMH1_K1: J2.16
PB29_TWD2_RD0_PWML1_M3: J2.42
PB30_TWCK2_RF0_M4: J2.34
PB31_TF0_L1: J2.18
PC0_SPI0_MISO_PWMH2_ISI_D8: J2.50
PC1_SPI0_MOSI_PWML2_ISI_D9_P8: J3.43
PC2_SPI0_SPCK_PWMH3_ISI_D10_V5: J2.48
PC3_SPI0_NPCS0_PWML3_ISI_D11_T9: J3.40
PC4_SPI0_NPCS1_MCI0_CK_PCK1_W5: J3.33
PC19_ISI_D0_TK1_U14: J3.32
PC20_ISI_D1_TF1_V11: J3.36
PC21_ISI_D2_TD1_U15: J3.27
PC22_ISI_D3_RF1_T15: J3.41
PC23_ISI_D4_RD1_U16: J3.28
PC24_ISI_D5_RK1_PCK1_T16: J3.30
PC25_ISI_D6_TWD3_URXD1_V17: J3.16
PC26_ISI_D7_TWCK3_UTXD1_R16: J3.25
PC27_AD0_SPI0_NPCS1_PWML0_U12: J1.46 R10.2 R11.2 | length 68.6
  Bottom Layer w0.35: J1.46 36.36,66.14 38.325,64.175 38.325,41.985 41.21,39.1 51.81,39.1 57.71,33.2 62.1,33.2 63.4,34.5 63.8,34.5 ; R10.2 63.8,34.5 ; R11.2 64.1,39.8 63.8,39.5 63.8,34.5
PC28_AD1_SPI0_NPCS2_PWML1_T11: J1.48 R6.2 R7.2 | length 56.2
  Top Layer w0.35: v1(33.78,68.68) 38.325,64.135 38.325,48.525 39.021,47.829 39.021,45.7 39.95,44.771 39.95,42.85 43.2,39.6 57.05,39.6 v1(59.5,37.15)
  Bottom Layer w0.35: J1.48 v1(33.78,68.68) ; R7.2 59.5,37.1 v1(59.5,37.15) R6.2
PC29_AD2_SPI0_NPCS3_PWMFI0_R13: J1.50 R12.2 R13.2 | length 65
  Top Layer w0.35: v1(33.8,71.2) 35.46,71.2 39.025,67.635 39.025,48.815 39.721,48.119 39.721,46 40.65,45.071 40.65,43.14 43.49,40.3 57.34,40.3 59.665,37.975 64.475,37.975 v1(65.3,37.15)
  Bottom Layer w0.35: J1.50 33.78,71.22 v1(33.8,71.2) ; R13.2 65.3,37.1 v1(65.3,37.15) R12.2
PC30_AD3_PWMH0_T12: J1.52 R8.2 R9.2 | length 66.5
  Bottom Layer w0.35: J1.52 32.9,73.76 39.025,67.635 39.025,42.275 41.5,39.8 52.1,39.8 57.4,34.5 58,34.5 ; R8.2 58,34.5 ; R9.2 58.6,39.8 58,39.2 58,34.5
PC31_AD4_PWMH1_T13: J3.31
PD8_PCK0_M1: J2.20
PD9_FIQ_M2: J2.19
PD10_CTS0_N2: J2.23
PD11_RTS0_SPI2_MISO_N3: J2.24
PD12_RXD0_N1: J2.22
PD13_TXD0_SPI2_MOSI_P3: J2.25
PD14_CTS1_P2: J2.33
PD15_RTS1_SPI2_SPCK_N4: J3.47
PD16_RXD1_R2: J2.32
PD17_TXD1_SPI2_NPCS0_R3: J2.31
PD19_P11: J3.35
PD20_T10: J3.48
PD21_P10: J3.39
PD22_U11: J3.38
PD23_R10: J3.42
PD24_U10: J3.37
PD25_R11: J3.34
PD26_U13: J2.38
PD27_T14: J3.46
PD28_SCK0_R1: J2.27
PD29_SCK1_P1: J2.26
PD31_SPI0_NPCS2_PCK1_P5: J3.50
PE0_MCI0_CDB_CTS4_W19: J3.29
PE1_MCI0_DB0_U17: J3.20
PE2_MCI0_DB1_T17: J3.19
PE3_MCI0_DB2_P16: J3.22
PE4_MCI0_DB3_U18: J3.21
PE5_CTS3_R17: J3.18
PE6_TIOA3_V19: J3.13
PE7_TIOB3_PWMFI1_U19: J3.12
PE8_TCLK3_PWML3_T19: J3.24
PE9_TIOA2_T18: J3.11
PE10_TIOB2_N14: J3.44
PE11_TCLK2_R18: J3.7
PE12_TIOA1_PWMH2_P17: J3.15
PE13_TIOB1_PWML2_P18: J3.9
PE14_TCLK1_PWMH3_N17: J3.14
PE15_SCK3_TIOA0_N18: J3.6
PE16_RXD3_TIOB0_M15: J3.26
PE17_TXD3_TCLK0_N19: J3.5
PE24_RTS3_L19: J3.10
PE25_SCK4_IRQ_M17: J3.8
PE26_RXD4_L15: J3.23
PE27_TXD4_M16: J3.17
PE28_RTS4_L17: J3.3
PE29_DIBP_URXD0_TWD1_V1: J2.28
PE30_DIBN_UTXD0_TWCK1_U2: J2.30
PE31_ADTRG_L4: J2.21
PIOBU0_U3: J2.40
PIOBU1: J3.52
SHDN_T2: J2.29
SW: L1.1 U2.4 | length 6.8
  Bottom Layer w0.35: 96.325,19.045 96.905,19.625 98.6,19.625
  Bottom Layer w0.5: L1.1 96.325,19.045
VBATT: J2.2
WKUP_V3: J2.36
pads on no net: "?.Fiducial Mark" "_1.Fiducial Mark" J1.2 J1.3 J1.4 J1.5 J2.4 J2.44 J2.51 J3.2 J3.4 J4.6 J4.Z1 J4.Z2 U2.3 U2.6

## Polygon pours and split planes (outlines as drawn)
SW on Bottom Layer "sw" (solid, remove dead copper, pour order 13): 99.3,20.2 99.8,19.7 99.8,12.7 99.8,10.5 93.2,10.5 93.2,19.9 93.5,20.2
+5V on Bottom Layer "+5V" (solid, remove dead copper, pour order 14): 100,20 107.9,20 108,19.9 108,5.8 107.7,5.5 96.3,5.5 96,5.8 96,10.3 96.2,10.5 100,10.5
GND on Bottom Layer "gnd" (solid, remove dead copper, pour order 15): 0.2,0.2 119.8,0.2 119.8,83.8 0.2,83.8
GND on Top Layer "gnd" (solid, remove dead copper, pour order 12): 0.2,0.2 119.8,0.2 119.8,83.8 0.2,83.8

## Silkscreen, mask and mechanical layers (free items; w line width, h text height)
Top Overlay:
  lines w0.3: 7.25,8.25 112.75,8.25 112.75,75.75 7.25,75.75 7.25,8.25
  text "EVA01 SHIELD" at 7.2,79.9 h5
  text "DISPLAY LCD 4.3''" at 7.2,76.7 h4
  text "Display LCD Flat --->" at 100.5,72 h2 r270
  text "develboard" at 27.4,0.9 h6
Bottom Overlay:
  lines w0.2: 101.9,21.6 101.9,21.8 105.7,21.8 105.7,21.5
  lines w0.35: 35,0 54.9,0 ; 67.6,0 84,0 ; 92.2,0 104.6,0
  text "EVA01 SHIELD" at 111.5,66.8 h5
  text "DISPLAY LCD 4.3''" at 111.4,62.7 h4
  text "Display LCD Flat --->" at 100.7,35.5 h2 r270
  text "Autodetect" at 92.3,20.3 h1.5
  text "EEPROM" at 92.3,18.6 h1.5
  text "develboard" at 75.1,14.3 h6
  text "Rev.A" at 3.5,7.6 h2 r270
Top Solder:
  text "Develer" at 115.2,7.8 h2 r90
  text "EVA01 Shield" at 116.9,7.799 h2 r90
  text ".:DB:. Rev.A" at 118.6,7.799 h2 r90
Bottom Solder:
  text ".:DB:. Rev.A" at 1.4,7.5 h2 r270
Outline:
  lines w0.2: 0,0 0,84 120,84 120,0 0,0 ; 41.5,45 41.5,57.5 99,57.5 99,45 41.5,45
Drawing:
  lines w0.05: 0,0 120,84 ; 0,84 120,0 ; 7.25,8.25 112.75,75.75 ; 7.25,75.75 112.75,8.25 ; 73.75,30.5 94.25,75.75 ; 73.75,75.75 94.25,30.5
  lines w0.1: 44,50.5 44,73.86 ; 73.75,50.5 73.75,75.75 ; 94,30.5 94.25,30.5 ; 94.25,40.5 94.25,75.75 112.75,75.75 ; 112.75,75.75 7.25,75.75 7.25,8.25 112.75,8.25 112.75,75.75
  lines w0.2: 44,50.5 73.6,50.5 ; 73.75,75.75 73.75,30.5 94,30.5 ; 75,40.5 94.25,40.5 ; 84,37.5 84,53.125 ; 85.8,81.1 85.8,92.1 87.2,89.7 84.6,89.7 84.4,89.9 84.4,90.5 85.8,91.9 ; 94.25,30.5 94.25,50.5 ; 94.25,71.15 94.25,75.75 ; 0,0 0,51.5 ccw(c-23.744,58.1) 0,64.7 0,84 120,84 120,0 0,0
  text "Mechanical Characteristics" at 3,88.5 h5
  text "UP" at 78,87 h5
  text "Flat --->" at 84,71 h4 r270
  text "DISPLAY 4.3''" at 8.5,60 h5 r270
  text "EVA01" at 8.5,0.5 h5
Assembly_top:
  text "Assembly TOP" at 2.328,87.439 h5
Assembly_bot:
  text "Assembly Bottom" at 39.328,87.439 h5
Note_top:
  text "Note TOP" at 2.328,87.439 h5
Note_bot:
  text "Note Bottom" at 39.228,87.539 h5
PCB_Note:
  lines w0.2: 41.5,45 41.5,57.5 99,57.5 99,45 41.5,45
  text "Scontornatura" at 47.5,52.5 h4
  text "Interna" at 47.5,48.8 h4
Mechanical 8:
  drawing of 1952 lines, arcs and shapes, not listed

## Dimensions
41.5,45 to 99,45 on PCB_Note
99,57.5 to 99,45 on PCB_Note
112.75,75.75 to 73.75,30.5 on Drawing
112.75,75.75 to 73.75,50.5 on Drawing
94.25,50.5 to 112.75,75.75 on Drawing

## Text inside footprints (layer, text, board x,y; h text height)
J1: Bottom Overlay "2" at 30.94,9.47 h1.4 r180; Bottom Overlay "1" at 24.54,9.27 h1.4 r180; Bottom Overlay "52" at 30.94,75.35 h1.4 r180; Bottom Overlay "51" at 24.14,75.39 h1.4 r180
J2: Bottom Overlay "2" at 36.04,3.44 h1.4 r90; Bottom Overlay "1" at 35.84,9.84 h1.4 r90; Bottom Overlay "52" at 101.92,3.44 h1.4 r90; Bottom Overlay "51" at 101.96,10.24 h1.4 r90
J3: Bottom Overlay "2" at 36.04,74.56 h1.4 r90; Bottom Overlay "1" at 35.84,80.96 h1.4 r90; Bottom Overlay "52" at 101.92,74.56 h1.4 r90; Bottom Overlay "51" at 101.96,81.36 h1.4 r90
J4: Bottom Overlay "40" at 94.414,35.629 h1.3 r180; Bottom Overlay "1" at 73.205,35.629 h1.3 r180
"Logo Develer_1": Top Overlay "develer" at 7.9,0.8 h4.4
"Logo Develer_2": Bottom Overlay "develer" at 79.7,19.4 h4.4